# EAGLE board Transmitter V1_ready (EAGLE 9.6.0)
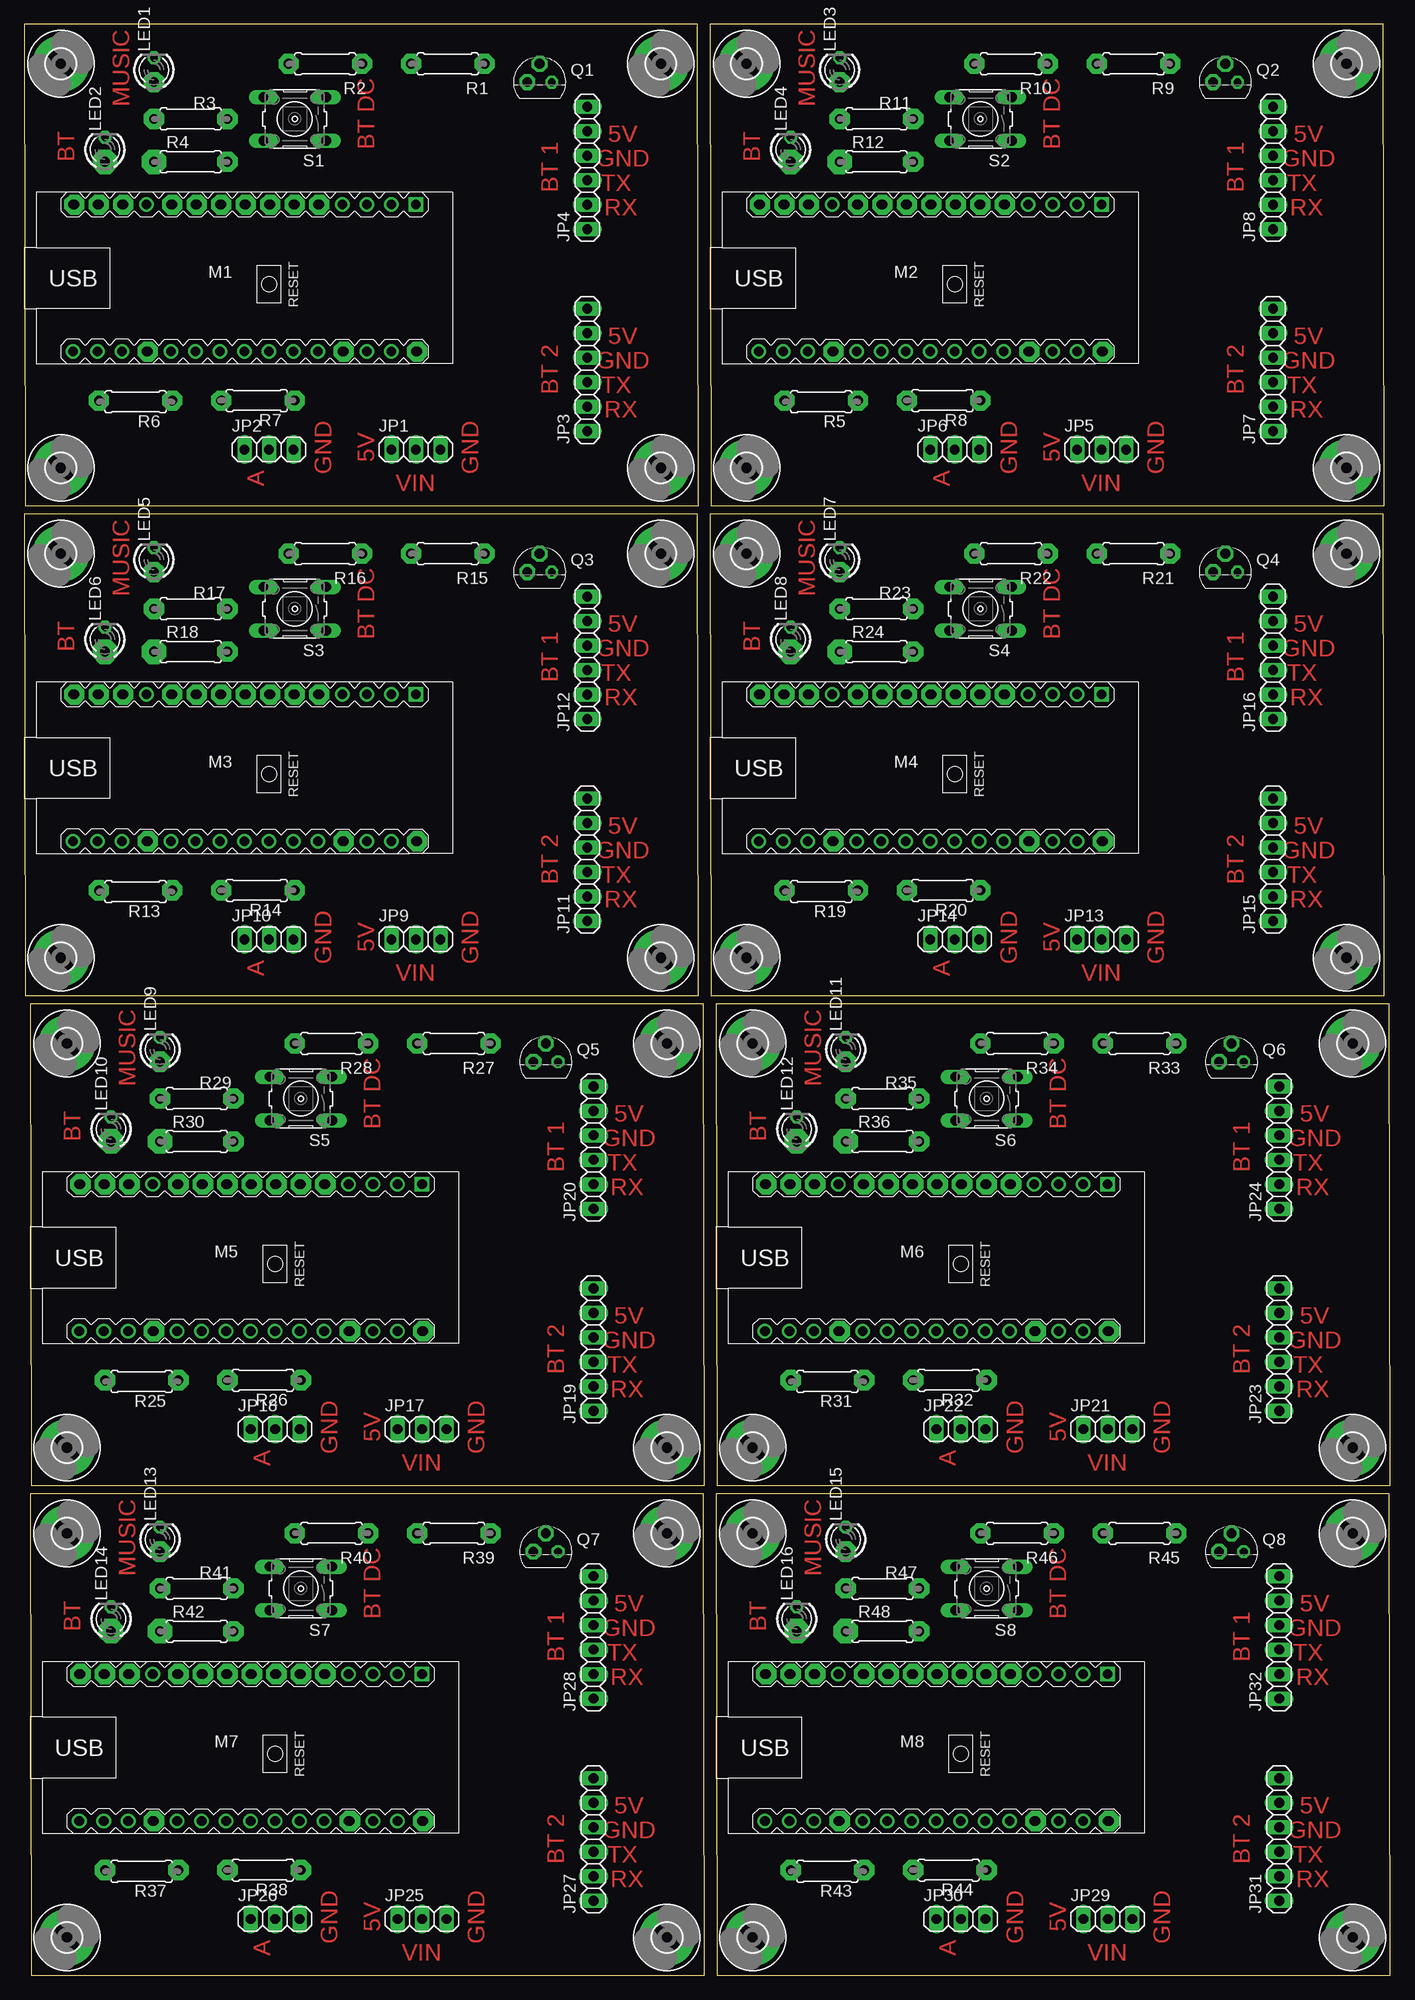
[diagram p0: board, top side]
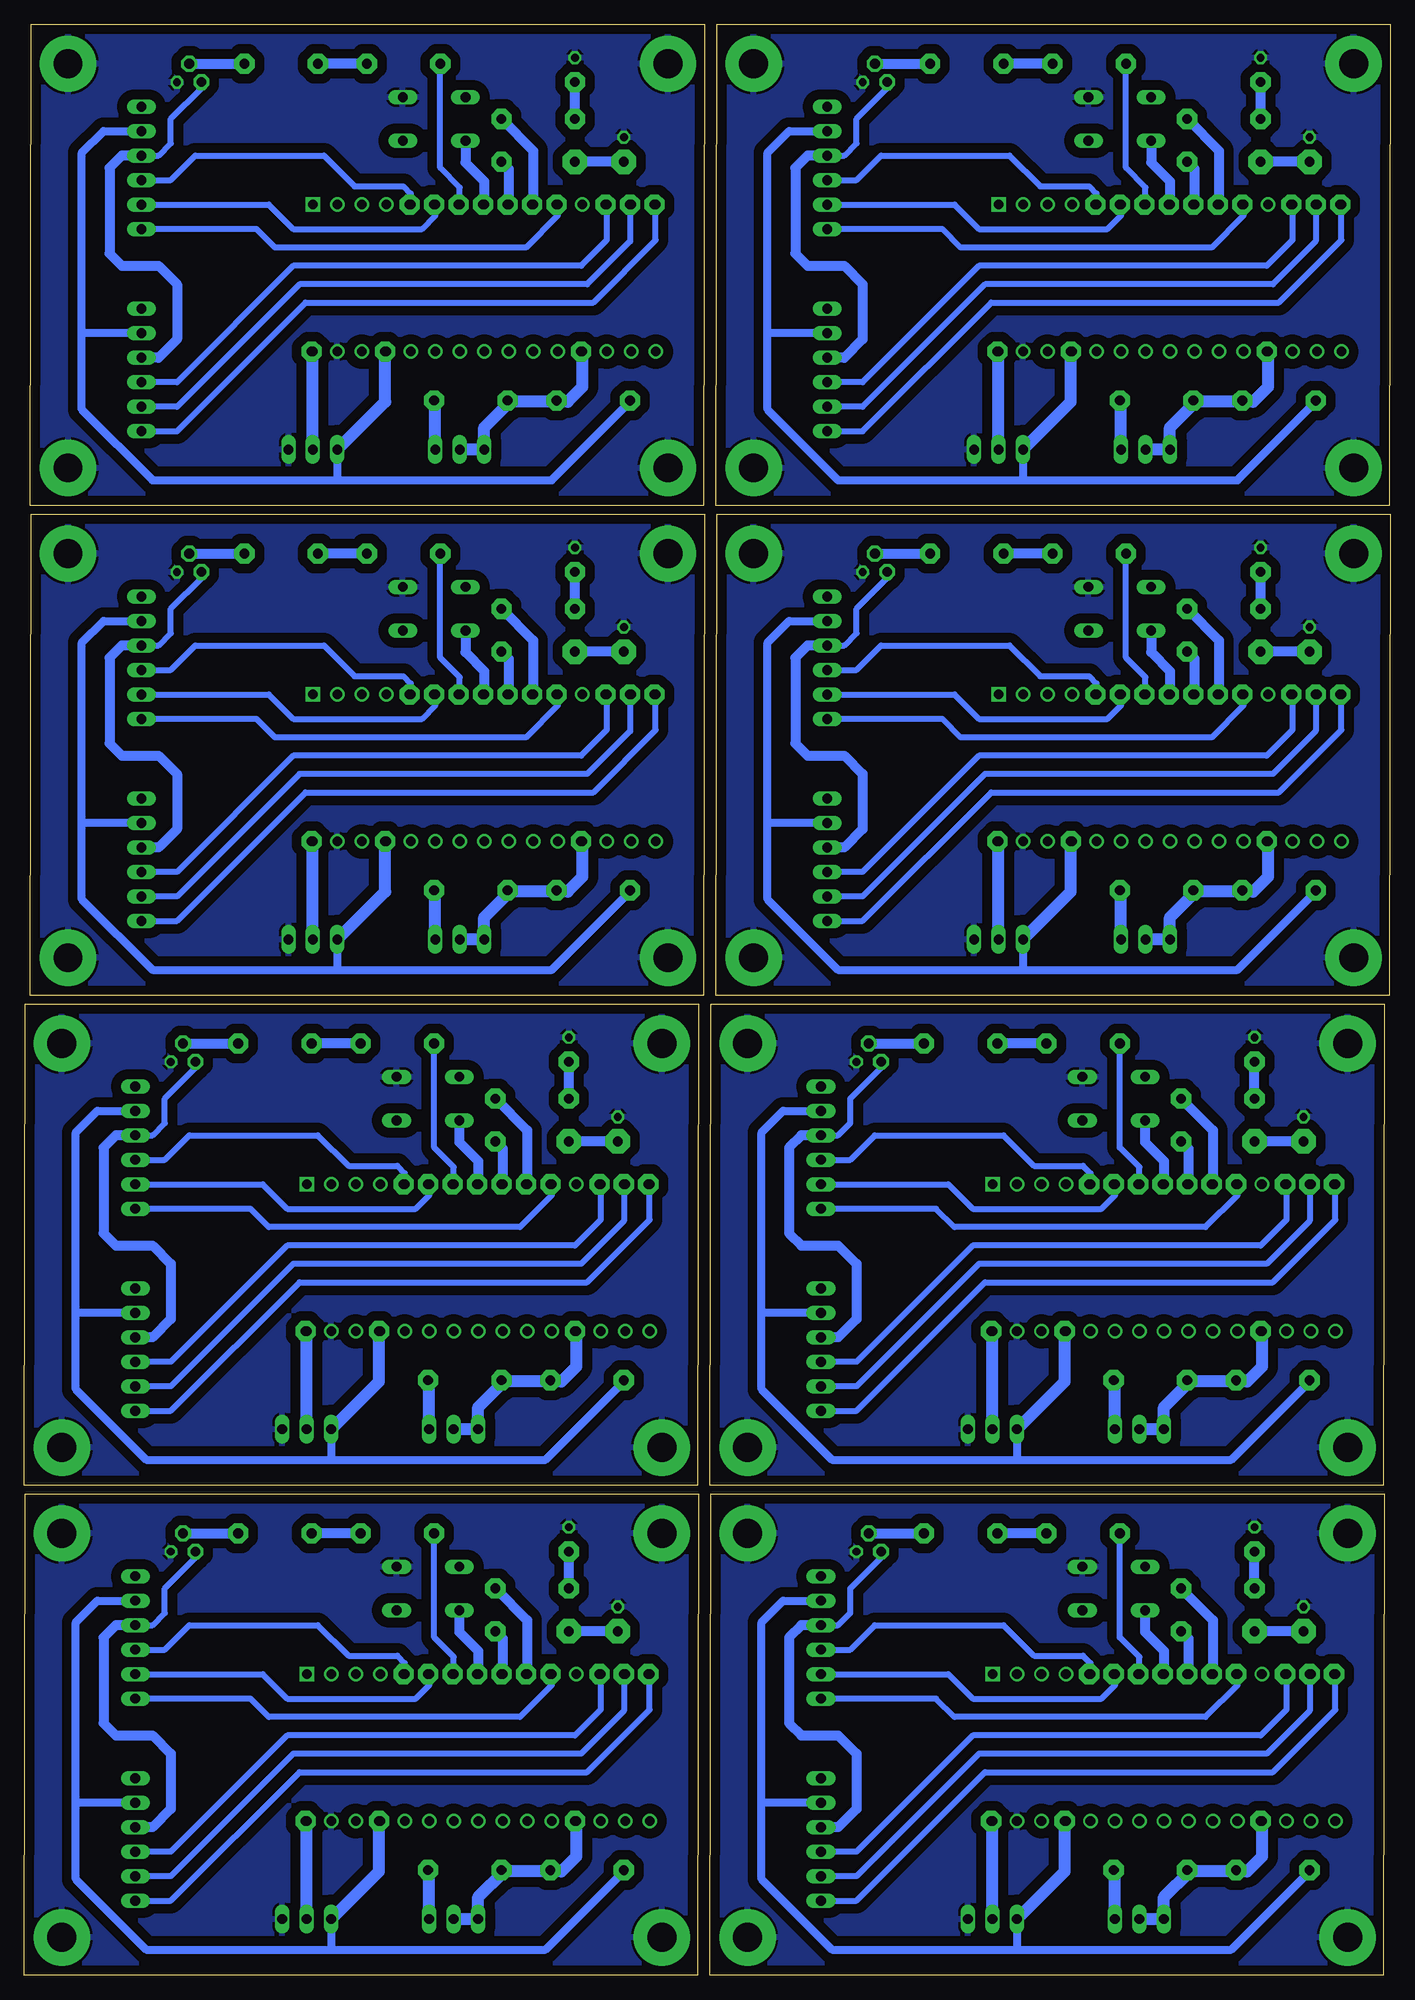
[diagram p1: board, bottom side, seen from below]

Size 141.71 x 202.36 mm. Coordinates in mm from the lower left corner, seen from the top.
Outline: 0.13,152.4 69.96,152.4 69.83,202.36 0,202.36 0.13,152.4
Outline: 71.25,152.4 141.08,152.4 140.95,202.36 71.12,202.36 71.25,152.4
Outline: 0.13,101.6 69.96,101.6 69.83,151.56 0,151.56 0.13,101.6
Outline: 71.25,101.6 141.08,101.6 140.95,151.56 71.12,151.56 71.25,101.6
Outline: 0.76,50.8 70.59,50.8 70.46,100.76 0.64,100.76 0.76,50.8
Outline: 71.88,50.8 141.71,50.8 141.59,100.76 71.75,100.76 71.88,50.8
Outline: 0.76,0 70.59,0 70.46,49.96 0.64,49.96 0.76,0
Outline: 71.88,0 141.71,0 141.59,49.96 71.75,49.96 71.88,0
Copper layers (1*16): Top 0.035mm / dielectric 1.5mm / Bottom 0.035mm
Design rules "default": minimum track width 6mil, minimum drill 0.35mm, track to track 6mil, track to pad 6mil, pad to pad 6mil, via to via 6mil, smd to smd 6mil, copper to edge 40mil, drill to drill 6mil, minimum pad ring 10mil, minimum via ring 8mil, stop-mask expansion 4mil, vias tented up to drill 0mil, thermal gap 10mil

## Footprints (pad centres in the part's own frame; a part is rotated, then mirrored left to right if it is on the bottom)
3,0-PAD = drill 3 pad 5.842: B3,0 0,0
1X03 = drill 1.016 long: 1 -2.54,0; 2 0,0; 3 2.54,0
1X06 = drill 1.016 long: 1 -6.35,0; 2 -3.81,0; 3 -1.27,0; 4 1.27,0; 5 3.81,0; 6 6.35,0
LED3MM = drill 0.813 octagon: A -1.27,0; K 1.27,0
ARDUINO-NANO-3.0 = drill 1 square: J1.1 17.78,7.62 | drill 1: J1.2 15.24,7.62; J1.3 12.7,7.62; J1.4 10.16,7.62; J1.5 7.62,7.62; J1.6 5.08,7.62; J1.7 2.54,7.62; J1.8 0,7.62; J1.9 -2.54,7.62; J1.10 -5.08,7.62; J1.11 -7.62,7.62; J1.12 -10.16,7.62; J1.13 -12.7,7.62; J1.14 -15.24,7.62; J1.15 -17.78,7.62; J2.1 17.78,-7.62; J2.2 15.24,-7.62; J2.3 12.7,-7.62; J2.4 10.16,-7.62; J2.5 7.62,-7.62; J2.6 5.08,-7.62; J2.7 2.54,-7.62; J2.8 0,-7.62; J2.9 -2.54,-7.62; J2.10 -5.08,-7.62; J2.11 -7.62,-7.62; J2.12 -10.16,-7.62; J2.13 -12.7,-7.62; J2.14 -15.24,-7.62; J2.15 -17.78,-7.62
TO92 = drill 0.813 octagon: 1 1.27,0; 2 0,1.905; 3 -1.27,0
0207/7 = drill 0.813 octagon: 1 -3.81,0; 2 3.81,0
B3F-10XX = drill 1.016 long: 1 -3.251,2.261; 2 3.251,2.261; 3 -3.251,-2.261; 4 3.251,-2.261

## Placement (x,y rotation side)
H1  MOUNT-PAD-ROUND3.0  [3,0-PAD]  3.81,198.25 0 top
H2  MOUNT-PAD-ROUND3.0  [3,0-PAD]  66.04,198.25 0 top
H3  MOUNT-PAD-ROUND3.0  [3,0-PAD]  66.04,156.34 0 top
H4  MOUNT-PAD-ROUND3.0  [3,0-PAD]  3.81,156.34 0 top
H5  MOUNT-PAD-ROUND3.0  [3,0-PAD]  74.93,198.25 0 top
H6  MOUNT-PAD-ROUND3.0  [3,0-PAD]  137.16,198.25 0 top
H7  MOUNT-PAD-ROUND3.0  [3,0-PAD]  137.16,156.34 0 top
H8  MOUNT-PAD-ROUND3.0  [3,0-PAD]  74.93,156.34 0 top
H9  MOUNT-PAD-ROUND3.0  [3,0-PAD]  3.81,147.45 0 top
H10  MOUNT-PAD-ROUND3.0  [3,0-PAD]  66.04,147.45 0 top
H11  MOUNT-PAD-ROUND3.0  [3,0-PAD]  66.04,105.54 0 top
H12  MOUNT-PAD-ROUND3.0  [3,0-PAD]  3.81,105.54 0 top
H13  MOUNT-PAD-ROUND3.0  [3,0-PAD]  74.93,147.45 0 top
H14  MOUNT-PAD-ROUND3.0  [3,0-PAD]  137.16,147.45 0 top
H15  MOUNT-PAD-ROUND3.0  [3,0-PAD]  137.16,105.54 0 top
H16  MOUNT-PAD-ROUND3.0  [3,0-PAD]  74.93,105.54 0 top
H17  MOUNT-PAD-ROUND3.0  [3,0-PAD]  4.44,96.65 0 top
H18  MOUNT-PAD-ROUND3.0  [3,0-PAD]  66.67,96.65 0 top
H19  MOUNT-PAD-ROUND3.0  [3,0-PAD]  66.67,54.74 0 top
H20  MOUNT-PAD-ROUND3.0  [3,0-PAD]  4.44,54.74 0 top
H21  MOUNT-PAD-ROUND3.0  [3,0-PAD]  75.56,96.65 0 top
H22  MOUNT-PAD-ROUND3.0  [3,0-PAD]  137.8,96.65 0 top
H23  MOUNT-PAD-ROUND3.0  [3,0-PAD]  137.8,54.74 0 top
H24  MOUNT-PAD-ROUND3.0  [3,0-PAD]  75.56,54.74 0 top
H25  MOUNT-PAD-ROUND3.0  [3,0-PAD]  4.44,45.85 0 top
H26  MOUNT-PAD-ROUND3.0  [3,0-PAD]  66.67,45.85 0 top
H27  MOUNT-PAD-ROUND3.0  [3,0-PAD]  66.67,3.94 0 top
H28  MOUNT-PAD-ROUND3.0  [3,0-PAD]  4.44,3.94 0 top
H29  MOUNT-PAD-ROUND3.0  [3,0-PAD]  75.56,45.85 0 top
H30  MOUNT-PAD-ROUND3.0  [3,0-PAD]  137.8,45.85 0 top
H31  MOUNT-PAD-ROUND3.0  [3,0-PAD]  137.8,3.94 0 top
H32  MOUNT-PAD-ROUND3.0  [3,0-PAD]  75.56,3.94 0 top
JP1  [1X03]  40.64,158.24 0 top
JP2  [1X03]  25.4,158.24 0 top
JP3  [1X06]  58.42,166.5 90 top
JP4  [1X06]  58.42,187.45 90 top
JP5  [1X03]  111.76,158.24 0 top
JP6  [1X03]  96.52,158.24 0 top
JP7  [1X06]  129.54,166.5 90 top
JP8  [1X06]  129.54,187.45 90 top
JP9  [1X03]  40.64,107.44 0 top
JP10  [1X03]  25.4,107.44 0 top
JP11  [1X06]  58.42,115.7 90 top
JP12  [1X06]  58.42,136.65 90 top
JP13  [1X03]  111.76,107.44 0 top
JP14  [1X03]  96.52,107.44 0 top
JP15  [1X06]  129.54,115.7 90 top
JP16  [1X06]  129.54,136.65 90 top
JP17  [1X03]  41.28,56.64 0 top
JP18  [1X03]  26.04,56.64 0 top
JP19  [1X06]  59.05,64.9 90 top
JP20  [1X06]  59.05,85.85 90 top
JP21  [1X03]  112.39,56.64 0 top
JP22  [1X03]  97.16,56.64 0 top
JP23  [1X06]  130.18,64.9 90 top
JP24  [1X06]  130.18,85.85 90 top
JP25  [1X03]  41.28,5.84 0 top
JP26  [1X03]  26.04,5.84 0 top
JP27  [1X06]  59.05,14.1 90 top
JP28  [1X06]  59.05,35.05 90 top
JP29  [1X03]  112.39,5.84 0 top
JP30  [1X03]  97.16,5.84 0 top
JP31  [1X06]  130.18,14.1 90 top
JP32  [1X06]  130.18,35.05 90 top
LED1  [LED3MM]  13.46,197.61 90 top
LED2  [LED3MM]  8.38,189.36 90 top
LED3  [LED3MM]  84.58,197.61 90 top
LED4  [LED3MM]  79.5,189.36 90 top
LED5  [LED3MM]  13.46,146.81 90 top
LED6  [LED3MM]  8.38,138.56 90 top
LED7  [LED3MM]  84.58,146.81 90 top
LED8  [LED3MM]  79.5,138.56 90 top
LED9  [LED3MM]  14.1,96.01 90 top
LED10  [LED3MM]  9.02,87.76 90 top
LED11  [LED3MM]  85.22,96.01 90 top
LED12  [LED3MM]  80.14,87.76 90 top
LED13  [LED3MM]  14.1,45.21 90 top
LED14  [LED3MM]  9.02,36.96 90 top
LED15  [LED3MM]  85.22,45.21 90 top
LED16  [LED3MM]  80.14,36.96 90 top
M1  ARDUINO-NANO-3.0  [ARDUINO-NANO-3.0]  22.86,176.02 0 top
M2  ARDUINO-NANO-3.0  [ARDUINO-NANO-3.0]  93.98,176.02 0 top
M3  ARDUINO-NANO-3.0  [ARDUINO-NANO-3.0]  22.86,125.22 0 top
M4  ARDUINO-NANO-3.0  [ARDUINO-NANO-3.0]  93.98,125.22 0 top
M5  ARDUINO-NANO-3.0  [ARDUINO-NANO-3.0]  23.49,74.42 0 top
M6  ARDUINO-NANO-3.0  [ARDUINO-NANO-3.0]  94.61,74.42 0 top
M7  ARDUINO-NANO-3.0  [ARDUINO-NANO-3.0]  23.49,23.62 0 top
M8  ARDUINO-NANO-3.0  [ARDUINO-NANO-3.0]  94.61,23.62 0 top
Q1  BC547B  [TO92]  53.47,196.34 0 top
Q2  BC547B  [TO92]  124.59,196.34 0 top
Q3  BC547B  [TO92]  53.47,145.54 0 top
Q4  BC547B  [TO92]  124.59,145.54 0 top
Q5  BC547B  [TO92]  54.1,94.74 0 top
Q6  BC547B  [TO92]  125.22,94.74 0 top
Q7  BC547B  [TO92]  54.1,43.94 0 top
Q8  BC547B  [TO92]  125.22,43.94 0 top
R1  82K  [0207/7]  43.94,198.25 180 top
R2  5K6  [0207/7]  31.24,198.25 180 top
R3  100  [0207/7]  17.27,192.53 0 top
R4  100  [0207/7]  17.27,188.09 0 top
R5  100K  [0207/7]  82.68,163.19 180 top
R6  100K  [0207/7]  11.56,163.19 180 top
R7  100K  [0207/7]  24.13,163.32 180 top
R8  100K  [0207/7]  95.25,163.32 180 top
R9  82K  [0207/7]  115.06,198.25 180 top
R10  5K6  [0207/7]  102.36,198.25 180 top
R11  100  [0207/7]  88.39,192.53 0 top
R12  100  [0207/7]  88.39,188.09 0 top
R13  100K  [0207/7]  11.56,112.39 180 top
R14  100K  [0207/7]  24.13,112.52 180 top
R15  82K  [0207/7]  43.94,147.45 180 top
R16  5K6  [0207/7]  31.24,147.45 180 top
R17  100  [0207/7]  17.27,141.73 0 top
R18  100  [0207/7]  17.27,137.29 0 top
R19  100K  [0207/7]  82.68,112.39 180 top
R20  100K  [0207/7]  95.25,112.52 180 top
R21  82K  [0207/7]  115.06,147.45 180 top
R22  5K6  [0207/7]  102.36,147.45 180 top
R23  100  [0207/7]  88.39,141.73 0 top
R24  100  [0207/7]  88.39,137.29 0 top
R25  100K  [0207/7]  12.19,61.59 180 top
R26  100K  [0207/7]  24.77,61.72 180 top
R27  82K  [0207/7]  44.58,96.65 180 top
R28  5K6  [0207/7]  31.88,96.65 180 top
R29  100  [0207/7]  17.91,90.93 0 top
R30  100  [0207/7]  17.91,86.49 0 top
R31  100K  [0207/7]  83.31,61.59 180 top
R32  100K  [0207/7]  95.88,61.72 180 top
R33  82K  [0207/7]  115.7,96.65 180 top
R34  5K6  [0207/7]  103,96.65 180 top
R35  100  [0207/7]  89.03,90.93 0 top
R36  100  [0207/7]  89.03,86.49 0 top
R37  100K  [0207/7]  12.19,10.79 180 top
R38  100K  [0207/7]  24.77,10.92 180 top
R39  82K  [0207/7]  44.58,45.85 180 top
R40  5K6  [0207/7]  31.88,45.85 180 top
R41  100  [0207/7]  17.91,40.13 0 top
R42  100  [0207/7]  17.91,35.69 0 top
R43  100K  [0207/7]  83.31,10.79 180 top
R44  100K  [0207/7]  95.88,10.92 180 top
R45  82K  [0207/7]  115.7,45.85 180 top
R46  5K6  [0207/7]  103,45.85 180 top
R47  100  [0207/7]  89.03,40.13 0 top
R48  100  [0207/7]  89.03,35.69 0 top
S1  [B3F-10XX]  28.07,192.53 180 top
S2  [B3F-10XX]  99.19,192.53 180 top
S3  [B3F-10XX]  28.07,141.73 180 top
S4  [B3F-10XX]  99.19,141.73 180 top
S5  [B3F-10XX]  28.7,90.93 180 top
S6  [B3F-10XX]  99.82,90.93 180 top
S7  [B3F-10XX]  28.7,40.13 180 top
S8  [B3F-10XX]  99.82,40.13 180 top

## Library data of the parts
H1-H32 = holes
JP1-JP32 = pinhead
LED1-LED16 = led
M1-M8 = diy-modules
Q1-Q8 = transistor-npn
R1-R48 = rcl; SPICEPREFIX: R
S1-S8 = switch-omron; MPN: B3F-1000; OC_FARNELL: 176432; OC_NEWARK: 36M3542

## Nets
3V1: M2.J2.14
3V2: M3.J2.14
3V3: M1.J2.14
3V4: M4.J2.14
3V5: M5.J2.14
3V6: M6.J2.14
3V7: M7.J2.14
3V8: M8.J2.14
5V: JP1.1 JP3.5 JP4.5 M1.J2.4 R6.2
5V1: JP5.1 JP7.5 JP8.5 M2.J2.4 R5.2
5V2: JP9.1 JP11.5 JP12.5 M3.J2.4 R13.2
5V3: JP13.1 JP15.5 JP16.5 M4.J2.4 R19.2
5V4: JP17.1 JP19.5 JP20.5 M5.J2.4 R25.2
5V5: JP21.1 JP23.5 JP24.5 M6.J2.4 R31.2
5V6: JP25.1 JP27.5 JP28.5 M7.J2.4 R37.2
5V7: JP29.1 JP31.5 JP32.5 M8.J2.4 R43.2
A0: JP2.1 JP2.2 M1.J2.12 R6.1 R7.2
A1: JP6.1 JP6.2 M2.J2.12 R5.1 R8.2
A2: JP10.1 JP10.2 M3.J2.12 R13.1 R14.2
A3: JP14.1 JP14.2 M4.J2.12 R19.1 R20.2
A4: JP18.1 JP18.2 M5.J2.12 R25.1 R26.2
A5: JP22.1 JP22.2 M6.J2.12 R31.1 R32.2
A6: JP26.1 JP26.2 M7.J2.12 R37.1 R38.2
A7: JP30.1 JP30.2 M8.J2.12 R43.1 R44.2
GND: H1.B3,0 H2.B3,0 H3.B3,0 H4.B3,0 JP1.3 LED1.K LED2.K M1.J2.2 Q1.1 S1.3
GND1: H5.B3,0 H6.B3,0 H7.B3,0 H8.B3,0 JP5.3 LED3.K LED4.K M2.J2.2 Q2.1 S2.3
GND2: H9.B3,0 H10.B3,0 H11.B3,0 H12.B3,0 JP9.3 LED5.K LED6.K M3.J2.2 Q3.1 S3.3
GND3: H13.B3,0 H14.B3,0 H15.B3,0 H16.B3,0 JP13.3 LED7.K LED8.K M4.J2.2 Q4.1 S4.3
GND4: H17.B3,0 H18.B3,0 H19.B3,0 H20.B3,0 JP17.3 LED9.K LED10.K M5.J2.2 Q5.1 S5.3
GND5: H21.B3,0 H22.B3,0 H23.B3,0 H24.B3,0 JP21.3 LED11.K LED12.K M6.J2.2 Q6.1 S6.3
GND6: H25.B3,0 H26.B3,0 H27.B3,0 H28.B3,0 JP25.3 LED13.K LED14.K M7.J2.2 Q7.1 S7.3
GND7: H29.B3,0 H30.B3,0 H31.B3,0 H32.B3,0 JP29.3 LED15.K LED16.K M8.J2.2 Q8.1 S8.3
GND.1: M1.J1.4
GND.2: M2.J1.4
GND.3: M3.J1.4
GND.4: M4.J1.4
GND.5: M5.J1.4
GND.6: M6.J1.4
GND.7: M7.J1.4
GND.8: M8.J1.4
N$1: M1.J1.7 R2.2
N$2: Q1.2 R1.1
N$3: R1.2 R2.1
N$4: JP3.4 JP4.4 Q1.3
N$5: M1.J1.8 S1.2
N$6: JP3.2 M1.J1.14
N$7: LED2.A R4.1
N$8: LED1.A R3.1
N$9: M1.J1.10 R3.2
N$10: M1.J1.9 R4.2
N$11: JP4.2 M1.J1.6
N$12: JP2.3 R7.1
N$13: JP4.3 M1.J1.5
N$14: JP3.3 M1.J1.13
N$15: JP3.1 M1.J1.15
N$18: M1.J2.11
N$46: JP6.3 R8.1
N$47: JP8.3 M2.J1.5
N$48: JP4.1 M1.J1.11
N$49: JP8.2 M2.J1.6
N$50: M2.J2.11
N$51: M2.J1.7 R10.2
N$52: Q2.2 R9.1
N$53: R9.2 R10.1
N$54: JP7.4 JP8.4 Q2.3
N$55: M2.J1.8 S2.2
N$56: LED4.A R12.1
N$57: LED3.A R11.1
N$58: M2.J1.10 R11.2
N$59: M2.J1.9 R12.2
N$60: JP7.2 M2.J1.14
N$61: JP7.3 M2.J1.13
N$62: JP7.1 M2.J1.15
N$63: JP8.1 M2.J1.11
N$93: JP10.3 R14.1
N$94: JP12.3 M3.J1.5
N$95: JP12.2 M3.J1.6
N$96: M3.J2.11
N$97: M3.J1.7 R16.2
N$98: Q3.2 R15.1
N$99: R15.2 R16.1
N$100: JP11.4 JP12.4 Q3.3
N$101: M3.J1.8 S3.2
N$102: LED6.A R18.1
N$103: LED5.A R17.1
N$104: M3.J1.10 R17.2
N$105: M3.J1.9 R18.2
N$106: JP11.2 M3.J1.14
N$107: JP11.3 M3.J1.13
N$108: JP11.1 M3.J1.15
N$109: JP12.1 M3.J1.11
N$139: JP14.3 R20.1
N$140: JP16.3 M4.J1.5
N$141: JP16.2 M4.J1.6
N$142: M4.J2.11
N$143: M4.J1.7 R22.2
N$144: Q4.2 R21.1
N$145: R21.2 R22.1
N$146: JP15.4 JP16.4 Q4.3
N$147: M4.J1.8 S4.2
N$148: LED8.A R24.1
N$149: LED7.A R23.1
N$150: M4.J1.10 R23.2
N$151: M4.J1.9 R24.2
N$152: JP15.2 M4.J1.14
N$153: JP15.3 M4.J1.13
N$154: JP15.1 M4.J1.15
N$155: JP16.1 M4.J1.11
N$185: JP18.3 R26.1
N$186: JP20.3 M5.J1.5
N$187: JP20.2 M5.J1.6
N$188: M5.J2.11
N$189: M5.J1.7 R28.2
N$190: Q5.2 R27.1
N$191: R27.2 R28.1
N$192: JP19.4 JP20.4 Q5.3
N$193: M5.J1.8 S5.2
N$194: LED10.A R30.1
N$195: LED9.A R29.1
N$196: M5.J1.10 R29.2
N$197: M5.J1.9 R30.2
N$198: JP19.2 M5.J1.14
N$199: JP19.3 M5.J1.13
N$200: JP19.1 M5.J1.15
N$201: JP20.1 M5.J1.11
N$231: JP22.3 R32.1
N$232: JP24.3 M6.J1.5
N$233: JP24.2 M6.J1.6
N$234: M6.J2.11
N$235: M6.J1.7 R34.2
N$236: Q6.2 R33.1
N$237: R33.2 R34.1
N$238: JP23.4 JP24.4 Q6.3
N$239: M6.J1.8 S6.2
N$240: LED12.A R36.1
N$241: LED11.A R35.1
N$242: M6.J1.10 R35.2
N$243: M6.J1.9 R36.2
N$244: JP23.2 M6.J1.14
N$245: JP23.3 M6.J1.13
N$246: JP23.1 M6.J1.15
N$247: JP24.1 M6.J1.11
N$277: JP26.3 R38.1
N$278: JP28.3 M7.J1.5
N$279: JP28.2 M7.J1.6
N$280: M7.J2.11
N$281: M7.J1.7 R40.2
N$282: Q7.2 R39.1
N$283: R39.2 R40.1
N$284: JP27.4 JP28.4 Q7.3
N$285: M7.J1.8 S7.2
N$286: LED14.A R42.1
N$287: LED13.A R41.1
N$288: M7.J1.10 R41.2
N$289: M7.J1.9 R42.2
N$290: JP27.2 M7.J1.14
N$291: JP27.3 M7.J1.13
N$292: JP27.1 M7.J1.15
N$293: JP28.1 M7.J1.11
N$323: JP30.3 R44.1
N$324: JP32.3 M8.J1.5
N$325: JP32.2 M8.J1.6
N$326: M8.J2.11
N$327: M8.J1.7 R46.2
N$328: Q8.2 R45.1
N$329: R45.2 R46.1
N$330: JP31.4 JP32.4 Q8.3
N$331: M8.J1.8 S8.2
N$332: LED16.A R48.1
N$333: LED15.A R47.1
N$334: M8.J1.10 R47.2
N$335: M8.J1.9 R48.2
N$336: JP31.2 M8.J1.14
N$337: JP31.3 M8.J1.13
N$338: JP31.1 M8.J1.15
N$339: JP32.1 M8.J1.11
VIN: JP1.2 M1.J2.1
VIN1: JP5.2 M2.J2.1
VIN2: JP9.2 M3.J2.1
VIN3: JP13.2 M4.J2.1
VIN4: JP17.2 M5.J2.1
VIN5: JP21.2 M6.J2.1
VIN6: JP25.2 M7.J2.1
VIN7: JP29.2 M8.J2.1

## Tracks (layer width: path | path; a pad name or v marks a point on that pad's centre or on a via)
5V
  Bottom 0.813: 64.59,170.31 64.59,162.38 57.28,155.07 38.23,155.07 | 64.59,170.31 64.59,189.03 62.36,191.26 JP4.5 | JP3.5 64.59,170.31 | R6.2 15.88,155.07 38.23,155.07 | JP1.1 38.1,155.19 38.23,155.07
  Bottom 1.27: JP1.1 33.15,163.19 33.15,168.27 M1.J2.4
5V1
  Bottom 0.813: 135.71,170.31 135.71,162.38 128.4,155.07 109.35,155.07 | 135.71,170.31 135.71,189.03 133.48,191.26 JP8.5 | JP7.5 135.71,170.31 | R5.2 86.99,155.07 109.35,155.07 | JP5.1 109.22,155.19 109.35,155.07
  Bottom 1.27: JP5.1 104.27,163.19 104.27,168.27 M2.J2.4
5V2
  Bottom 0.813: 64.59,119.51 64.59,111.58 57.28,104.27 38.23,104.27 | 64.59,119.51 64.59,138.23 62.36,140.46 JP12.5 | JP11.5 64.59,119.51 | R13.2 15.88,104.27 38.23,104.27 | JP9.1 38.1,104.39 38.23,104.27
  Bottom 1.27: JP9.1 33.15,112.39 33.15,117.47 M3.J2.4
5V3
  Bottom 0.813: 135.71,119.51 135.71,111.58 128.4,104.27 109.35,104.27 | 135.71,119.51 135.71,138.23 133.48,140.46 JP16.5 | JP15.5 135.71,119.51 | R19.2 86.99,104.27 109.35,104.27 | JP13.1 109.22,104.39 109.35,104.27
  Bottom 1.27: JP13.1 104.27,112.39 104.27,117.47 M4.J2.4
5V4
  Bottom 0.813: 65.23,68.71 65.23,60.78 57.91,53.47 38.86,53.47 | 65.23,68.71 65.23,87.43 62.99,89.66 JP20.5 | JP19.5 65.23,68.71 | R25.2 16.51,53.47 38.86,53.47 | JP17.1 38.73,53.59 38.86,53.47
  Bottom 1.27: JP17.1 33.78,61.59 33.78,66.67 M5.J2.4
5V5
  Bottom 0.813: 136.35,68.71 136.35,60.78 129.03,53.47 109.98,53.47 | 136.35,68.71 136.35,87.43 134.11,89.66 JP24.5 | JP23.5 136.35,68.71 | R31.2 87.63,53.47 109.98,53.47 | JP21.1 109.85,53.59 109.98,53.47
  Bottom 1.27: JP21.1 104.9,61.59 104.9,66.67 M6.J2.4
5V6
  Bottom 0.813: 65.23,17.91 65.23,9.98 57.91,2.67 38.86,2.67 | 65.23,17.91 65.23,36.63 62.99,38.86 JP28.5 | JP27.5 65.23,17.91 | R37.2 16.51,2.67 38.86,2.67 | JP25.1 38.73,2.79 38.86,2.67
  Bottom 1.27: JP25.1 33.78,10.79 33.78,15.88 M7.J2.4
5V7
  Bottom 0.813: 136.35,17.91 136.35,9.98 129.03,2.67 109.98,2.67 | 136.35,17.91 136.35,36.63 134.11,38.86 JP32.5 | JP31.5 136.35,17.91 | R43.2 87.63,2.67 109.98,2.67 | JP29.1 109.85,2.79 109.98,2.67
  Bottom 1.27: JP29.1 104.9,10.79 104.9,15.88 M8.J2.4
A0
  Bottom 1.27: JP2.2 JP2.1 22.86,160.53 20.19,163.19 | 20.19,163.19 R6.1 14.22,163.19 12.7,164.72 M1.J2.12 | 20.19,163.19 R7.2
A1
  Bottom 1.27: JP6.2 JP6.1 93.98,160.53 91.31,163.19 | 91.31,163.19 R5.1 85.34,163.19 83.82,164.72 M2.J2.12 | 91.31,163.19 R8.2
A2
  Bottom 1.27: JP10.2 JP10.1 22.86,109.73 20.19,112.39 | 20.19,112.39 R13.1 14.22,112.39 12.7,113.92 M3.J2.12 | 20.19,112.39 R14.2
A3
  Bottom 1.27: JP14.2 JP14.1 93.98,109.73 91.31,112.39 | 91.31,112.39 R19.1 85.34,112.39 83.82,113.92 M4.J2.12 | 91.31,112.39 R20.2
A4
  Bottom 1.27: JP18.2 JP18.1 23.49,58.93 20.83,61.59 | 20.83,61.59 R25.1 14.86,61.59 13.34,63.12 M5.J2.12 | 20.83,61.59 R26.2
A5
  Bottom 1.27: JP22.2 JP22.1 94.61,58.93 91.95,61.59 | 91.95,61.59 R31.1 85.98,61.59 84.45,63.12 M6.J2.12 | 91.95,61.59 R32.2
A6
  Bottom 1.27: JP26.2 JP26.1 23.49,8.13 20.83,10.79 | 20.83,10.79 R37.1 14.86,10.79 13.34,12.32 M7.J2.12 | 20.83,10.79 R38.2
A7
  Bottom 1.27: JP30.2 JP30.1 94.61,8.13 91.95,10.79 | 91.95,10.79 R43.1 85.98,10.79 84.45,12.32 M8.J2.12 | 91.95,10.79 R44.2
GND
  pour Bottom (isolate 1.016): 0.13,202.06 69.98,202.06 69.98,152.53 0.13,152.53
GND1
  pour Bottom (isolate 1.016): 71.25,202.06 141.1,202.06 141.1,152.53 71.25,152.53
GND2
  pour Bottom (isolate 1.016): 0.13,151.26 69.98,151.26 69.98,101.73 0.13,101.73
GND3
  pour Bottom (isolate 1.016): 71.25,151.26 141.1,151.26 141.1,101.73 71.25,101.73
GND4
  pour Bottom (isolate 1.016): 0.76,100.46 70.61,100.46 70.61,50.93 0.76,50.93
GND5
  pour Bottom (isolate 1.016): 71.88,100.46 141.73,100.46 141.73,50.93 71.88,50.93
GND6
  pour Bottom (isolate 1.016): 0.76,49.66 70.61,49.66 70.61,0.13 0.76,0.13
GND7
  pour Bottom (isolate 1.016): 71.88,49.66 141.73,49.66 141.73,0.13 71.88,0.13
N$1
  Bottom 0.61: M1.J1.7 25.4,185.42 27.43,187.45 R2.2
N$2
  Bottom 1.016: Q1.2 R1.1
N$3
  Bottom 1.016: R2.1 R1.2
N$4
  Bottom 0.61: JP4.4 56.64,188.72 55.37,189.99 55.37,192.53 52.2,195.71 Q1.3
  Bottom 1.016: JP4.4 60.45,188.72 61.72,187.45 61.72,178.56 60.45,177.29 56.64,177.29 54.74,175.39 54.74,169.67 56.64,167.77 JP3.4
N$5
  Bottom 1.016: S1.2 24.82,188.01 22.86,186.05 M1.J1.8
N$6
  Bottom 0.61: JP3.2 54.74,162.69 42.04,175.39 12.19,175.39 7.75,179.83 7.75,183.51
  Bottom 0.813: M1.J1.14 7.75,183.51
N$7
  Bottom 1.016: LED2.A R4.1
N$8
  Bottom 1.016: R3.1 LED1.A
N$9
  Bottom 1.016: R3.2 17.78,189.23 M1.J1.10
N$10
  Bottom 1.016: R4.2 20.32,187.32 M1.J1.9
N$11
  Bottom 0.61: JP4.2 45.21,183.64 42.67,181.1 29.34,181.1 27.94,182.5 M1.J1.6
N$12
  Bottom 1.27: JP2.3 R7.1
N$13
  Bottom 0.61: M1.J1.5 30.48,184.78 31.24,185.55 36.32,185.55 39.5,188.72 52.83,188.72 55.37,186.18 JP4.3
N$14
  Bottom 0.61: JP3.3 54.74,165.23 42.67,177.29 12.83,177.29 10.16,179.96 M1.J1.13
N$15
  Bottom 0.61: JP3.1 54.74,160.15 41.4,173.48 11.56,173.48 5.08,179.96 M1.J1.15
N$16  (via drill 1 pad 2.54)
  other vias: 8.38,188.09
N$17  (via drill 1 pad 2.54)
  other vias: 13.46,188.09
N$19  (via drill 1 pad 2.1)
  other vias: 15.37,183.64
N$20  (via drill 1 pad 2.1)
  other vias: 17.91,183.64
N$21  (via drill 1 pad 2.1)
  other vias: 20.45,183.64
N$22  (via drill 1 pad 2.1)
  other vias: 22.99,183.64
N$23  (via drill 1 pad 2.1)
  other vias: 25.53,183.64
N$24  (via drill 1 pad 2.1)
  other vias: 5.21,183.64
N$25  (via drill 1 pad 2.1)
  other vias: 7.75,183.64
N$26  (via drill 1 pad 2.1)
  other vias: 10.29,183.64
N$27  (via drill 1 pad 2.1)
  other vias: 28.07,183.64
N$28  (via drill 1 pad 2.1)
  other vias: 30.61,183.64
N$29  (via drill 1 pad 2.1)
  other vias: 21.08,188.09
N$30  (via drill 1 pad 2.1)
  other vias: 27.43,198.25
N$31  (via drill 1 pad 2.1)
  other vias: 35.05,198.25
N$32  (via drill 1 pad 2.1)
  other vias: 40.13,198.25
N$33  (via drill 1 pad 2.1)
  other vias: 13.46,196.34
N$34  (via drill 1 pad 2.1)
  other vias: 21.08,192.53
N$35  (via drill 1 pad 2.1)
  other vias: 13.46,192.53
N$36  (via drill 1 pad 2.1)
  other vias: 47.75,198.25
N$37  (via drill 1 pad 1.63)
  other vias: 53.47,198.25
N$38  (via drill 1 pad 1.63)
  other vias: 52.2,196.34
N$39  (via drill 1 pad 2.1)
  other vias: 40.77,168.4
N$40  (via drill 1 pad 2.1)
  other vias: 33.15,168.4
N$41  (via drill 1 pad 2.1)
  other vias: 28.07,163.32
N$42  (via drill 1 pad 2.1)
  other vias: 20.45,163.32
N$43  (via drill 1 pad 2.1)
  other vias: 15.37,163.32
N$44  (via drill 1 pad 2.1)
  other vias: 7.75,163.32
N$45  (via drill 1 pad 2.1)
  other vias: 12.83,168.4
N$46
  Bottom 1.27: JP6.3 R8.1
N$47
  Bottom 0.61: M2.J1.5 101.6,184.78 102.36,185.55 107.44,185.55 110.62,188.72 123.95,188.72 126.49,186.18 JP8.3
N$48
  Bottom 0.61: M1.J1.11 15.24,182.5 18.54,179.2 44.58,179.2 46.48,181.1 JP4.1
N$49
  Bottom 0.61: JP8.2 116.33,183.64 113.79,181.1 100.46,181.1 99.06,182.5 M2.J1.6
N$51
  Bottom 0.61: M2.J1.7 96.52,185.42 98.55,187.45 R10.2
N$52
  Bottom 1.016: Q2.2 R9.1
N$53
  Bottom 1.016: R10.1 R9.2
N$54
  Bottom 0.61: JP8.4 127.76,188.72 126.49,189.99 126.49,192.53 123.32,195.71 Q2.3
  Bottom 1.016: JP8.4 131.57,188.72 132.84,187.45 132.84,178.56 131.57,177.29 127.76,177.29 125.86,175.39 125.86,169.67 127.76,167.77 JP7.4
N$55
  Bottom 1.016: S2.2 95.94,188.01 93.98,186.05 M2.J1.8
N$56
  Bottom 1.016: LED4.A R12.1
N$57
  Bottom 1.016: R11.1 LED3.A
N$58
  Bottom 1.016: R11.2 88.9,189.23 M2.J1.10
N$59
  Bottom 1.016: R12.2 91.44,187.32 M2.J1.9
N$60
  Bottom 0.61: JP7.2 125.86,162.69 113.16,175.39 83.31,175.39 78.87,179.83 78.87,183.51
  Bottom 0.813: M2.J1.14 78.87,183.51
N$61
  Bottom 0.61: JP7.3 125.86,165.23 113.79,177.29 83.95,177.29 81.28,179.96 M2.J1.13
N$62
  Bottom 0.61: JP7.1 125.86,160.15 112.52,173.48 82.68,173.48 76.2,179.96 M2.J1.15
N$63
  Bottom 0.61: M2.J1.11 86.36,182.5 89.66,179.2 115.7,179.2 117.6,181.1 JP8.1
N$64  (via drill 1 pad 2.54)
  other vias: 79.5,188.09
N$65  (via drill 1 pad 2.54)
  other vias: 84.58,188.09
N$66  (via drill 1 pad 2.1)
  other vias: 86.49,183.64
N$67  (via drill 1 pad 2.1)
  other vias: 89.03,183.64
N$68  (via drill 1 pad 2.1)
  other vias: 91.57,183.64
N$69  (via drill 1 pad 2.1)
  other vias: 94.11,183.64
N$70  (via drill 1 pad 2.1)
  other vias: 96.65,183.64
N$71  (via drill 1 pad 2.1)
  other vias: 76.33,183.64
N$72  (via drill 1 pad 2.1)
  other vias: 78.87,183.64
N$73  (via drill 1 pad 2.1)
  other vias: 81.41,183.64
N$74  (via drill 1 pad 2.1)
  other vias: 99.19,183.64
N$75  (via drill 1 pad 2.1)
  other vias: 101.73,183.64
N$76  (via drill 1 pad 2.1)
  other vias: 92.2,188.09
N$77  (via drill 1 pad 2.1)
  other vias: 98.55,198.25
N$78  (via drill 1 pad 2.1)
  other vias: 106.17,198.25
N$79  (via drill 1 pad 2.1)
  other vias: 111.25,198.25
N$80  (via drill 1 pad 2.1)
  other vias: 84.58,196.34
N$81  (via drill 1 pad 2.1)
  other vias: 92.2,192.53
N$82  (via drill 1 pad 2.1)
  other vias: 84.58,192.53
N$83  (via drill 1 pad 2.1)
  other vias: 118.87,198.25
N$84  (via drill 1 pad 1.63)
  other vias: 124.59,198.25
N$85  (via drill 1 pad 1.63)
  other vias: 123.32,196.34
N$86  (via drill 1 pad 2.1)
  other vias: 111.89,168.4
N$87  (via drill 1 pad 2.1)
  other vias: 104.27,168.4
N$88  (via drill 1 pad 2.1)
  other vias: 99.19,163.32
N$89  (via drill 1 pad 2.1)
  other vias: 91.57,163.32
N$90  (via drill 1 pad 2.1)
  other vias: 86.49,163.32
N$91  (via drill 1 pad 2.1)
  other vias: 78.87,163.32
N$92  (via drill 1 pad 2.1)
  other vias: 83.95,168.4
N$93
  Bottom 1.27: JP10.3 R14.1
N$94
  Bottom 0.61: M3.J1.5 30.48,133.98 31.24,134.75 36.32,134.75 39.5,137.92 52.83,137.92 55.37,135.38 JP12.3
N$95
  Bottom 0.61: JP12.2 45.21,132.84 42.67,130.3 29.34,130.3 27.94,131.7 M3.J1.6
N$97
  Bottom 0.61: M3.J1.7 25.4,134.62 27.43,136.65 R16.2
N$98
  Bottom 1.016: Q3.2 R15.1
N$99
  Bottom 1.016: R16.1 R15.2
N$100
  Bottom 0.61: JP12.4 56.64,137.92 55.37,139.19 55.37,141.73 52.2,144.91 Q3.3
  Bottom 1.016: JP12.4 60.45,137.92 61.72,136.65 61.72,127.76 60.45,126.49 56.64,126.49 54.74,124.59 54.74,118.87 56.64,116.97 JP11.4
N$101
  Bottom 1.016: S3.2 24.82,137.21 22.86,135.25 M3.J1.8
N$102
  Bottom 1.016: LED6.A R18.1
N$103
  Bottom 1.016: R17.1 LED5.A
N$104
  Bottom 1.016: R17.2 17.78,138.43 M3.J1.10
N$105
  Bottom 1.016: R18.2 20.32,136.52 M3.J1.9
N$106
  Bottom 0.61: JP11.2 54.74,111.89 42.04,124.59 12.19,124.59 7.75,129.03 7.75,132.71
  Bottom 0.813: M3.J1.14 7.75,132.71
N$107
  Bottom 0.61: JP11.3 54.74,114.43 42.67,126.49 12.83,126.49 10.16,129.16 M3.J1.13
N$108
  Bottom 0.61: JP11.1 54.74,109.35 41.4,122.68 11.56,122.68 5.08,129.16 M3.J1.15
N$109
  Bottom 0.61: M3.J1.11 15.24,131.7 18.54,128.4 44.58,128.4 46.48,130.3 JP12.1
N$110  (via drill 1 pad 2.54)
  other vias: 8.38,137.29
N$111  (via drill 1 pad 2.54)
  other vias: 13.46,137.29
N$112  (via drill 1 pad 2.1)
  other vias: 15.37,132.84
N$113  (via drill 1 pad 2.1)
  other vias: 17.91,132.84
N$114  (via drill 1 pad 2.1)
  other vias: 20.45,132.84
N$115  (via drill 1 pad 2.1)
  other vias: 22.99,132.84
N$116  (via drill 1 pad 2.1)
  other vias: 25.53,132.84
N$117  (via drill 1 pad 2.1)
  other vias: 5.21,132.84
N$118  (via drill 1 pad 2.1)
  other vias: 7.75,132.84
N$119  (via drill 1 pad 2.1)
  other vias: 10.29,132.84
N$120  (via drill 1 pad 2.1)
  other vias: 28.07,132.84
N$121  (via drill 1 pad 2.1)
  other vias: 30.61,132.84
N$122  (via drill 1 pad 2.1)
  other vias: 21.08,137.29
N$123  (via drill 1 pad 2.1)
  other vias: 27.43,147.45
N$124  (via drill 1 pad 2.1)
  other vias: 35.05,147.45
N$125  (via drill 1 pad 2.1)
  other vias: 40.13,147.45
N$126  (via drill 1 pad 2.1)
  other vias: 13.46,145.54
N$127  (via drill 1 pad 2.1)
  other vias: 21.08,141.73
N$128  (via drill 1 pad 2.1)
  other vias: 13.46,141.73
N$129  (via drill 1 pad 2.1)
  other vias: 47.75,147.45
N$130  (via drill 1 pad 1.63)
  other vias: 53.47,147.45
N$131  (via drill 1 pad 1.63)
  other vias: 52.2,145.54
N$132  (via drill 1 pad 2.1)
  other vias: 40.77,117.6
N$133  (via drill 1 pad 2.1)
  other vias: 33.15,117.6
N$134  (via drill 1 pad 2.1)
  other vias: 28.07,112.52
N$135  (via drill 1 pad 2.1)
  other vias: 20.45,112.52
N$136  (via drill 1 pad 2.1)
  other vias: 15.37,112.52
N$137  (via drill 1 pad 2.1)
  other vias: 7.75,112.52
N$138  (via drill 1 pad 2.1)
  other vias: 12.83,117.6
N$139
  Bottom 1.27: JP14.3 R20.1
N$140
  Bottom 0.61: M4.J1.5 101.6,133.98 102.36,134.75 107.44,134.75 110.62,137.92 123.95,137.92 126.49,135.38 JP16.3
N$141
  Bottom 0.61: JP16.2 116.33,132.84 113.79,130.3 100.46,130.3 99.06,131.7 M4.J1.6
N$143
  Bottom 0.61: M4.J1.7 96.52,134.62 98.55,136.65 R22.2
N$144
  Bottom 1.016: Q4.2 R21.1
N$145
  Bottom 1.016: R22.1 R21.2
N$146
  Bottom 0.61: JP16.4 127.76,137.92 126.49,139.19 126.49,141.73 123.32,144.91 Q4.3
  Bottom 1.016: JP16.4 131.57,137.92 132.84,136.65 132.84,127.76 131.57,126.49 127.76,126.49 125.86,124.59 125.86,118.87 127.76,116.97 JP15.4
N$147
  Bottom 1.016: S4.2 95.94,137.21 93.98,135.25 M4.J1.8
N$148
  Bottom 1.016: LED8.A R24.1
N$149
  Bottom 1.016: R23.1 LED7.A
N$150
  Bottom 1.016: R23.2 88.9,138.43 M4.J1.10
N$151
  Bottom 1.016: R24.2 91.44,136.52 M4.J1.9
N$152
  Bottom 0.61: JP15.2 125.86,111.89 113.16,124.59 83.31,124.59 78.87,129.03 78.87,132.71
  Bottom 0.813: M4.J1.14 78.87,132.71
N$153
  Bottom 0.61: JP15.3 125.86,114.43 113.79,126.49 83.95,126.49 81.28,129.16 M4.J1.13
N$154
  Bottom 0.61: JP15.1 125.86,109.35 112.52,122.68 82.68,122.68 76.2,129.16 M4.J1.15
N$155
  Bottom 0.61: M4.J1.11 86.36,131.7 89.66,128.4 115.7,128.4 117.6,130.3 JP16.1
N$156  (via drill 1 pad 2.54)
  other vias: 79.5,137.29
N$157  (via drill 1 pad 2.54)
  other vias: 84.58,137.29
N$158  (via drill 1 pad 2.1)
  other vias: 86.49,132.84
N$159  (via drill 1 pad 2.1)
  other vias: 89.03,132.84
N$160  (via drill 1 pad 2.1)
  other vias: 91.57,132.84
N$161  (via drill 1 pad 2.1)
  other vias: 94.11,132.84
N$162  (via drill 1 pad 2.1)
  other vias: 96.65,132.84
N$163  (via drill 1 pad 2.1)
  other vias: 76.33,132.84
N$164  (via drill 1 pad 2.1)
  other vias: 78.87,132.84
N$165  (via drill 1 pad 2.1)
  other vias: 81.41,132.84
N$166  (via drill 1 pad 2.1)
  other vias: 99.19,132.84
N$167  (via drill 1 pad 2.1)
  other vias: 101.73,132.84
N$168  (via drill 1 pad 2.1)
  other vias: 92.2,137.29
N$169  (via drill 1 pad 2.1)
  other vias: 98.55,147.45
N$170  (via drill 1 pad 2.1)
  other vias: 106.17,147.45
N$171  (via drill 1 pad 2.1)
  other vias: 111.25,147.45
N$172  (via drill 1 pad 2.1)
  other vias: 84.58,145.54
N$173  (via drill 1 pad 2.1)
  other vias: 92.2,141.73
N$174  (via drill 1 pad 2.1)
  other vias: 84.58,141.73
N$175  (via drill 1 pad 2.1)
  other vias: 118.87,147.45
N$176  (via drill 1 pad 1.63)
  other vias: 124.59,147.45
N$177  (via drill 1 pad 1.63)
  other vias: 123.32,145.54
N$178  (via drill 1 pad 2.1)
  other vias: 111.89,117.6
N$179  (via drill 1 pad 2.1)
  other vias: 104.27,117.6
N$180  (via drill 1 pad 2.1)
  other vias: 99.19,112.52
N$181  (via drill 1 pad 2.1)
  other vias: 91.57,112.52
N$182  (via drill 1 pad 2.1)
  other vias: 86.49,112.52
N$183  (via drill 1 pad 2.1)
  other vias: 78.87,112.52
N$184  (via drill 1 pad 2.1)
  other vias: 83.95,117.6
N$185
  Bottom 1.27: JP18.3 R26.1
N$186
  Bottom 0.61: M5.J1.5 31.11,83.18 31.88,83.95 36.96,83.95 40.13,87.12 53.47,87.12 56.01,84.58 JP20.3
N$187
  Bottom 0.61: JP20.2 45.85,82.04 43.31,79.5 29.97,79.5 28.57,80.9 M5.J1.6
N$189
  Bottom 0.61: M5.J1.7 26.04,83.82 28.07,85.85 R28.2
N$190
  Bottom 1.016: Q5.2 R27.1
N$191
  Bottom 1.016: R28.1 R27.2
N$192
  Bottom 0.61: JP20.4 57.28,87.12 56.01,88.39 56.01,90.93 52.83,94.11 Q5.3
  Bottom 1.016: JP20.4 61.09,87.12 62.36,85.85 62.36,76.96 61.09,75.69 57.28,75.69 55.37,73.79 55.37,68.07 57.28,66.17 JP19.4
N$193
  Bottom 1.016: S5.2 25.45,86.41 23.49,84.45 M5.J1.8
N$194
  Bottom 1.016: LED10.A R30.1
N$195
  Bottom 1.016: R29.1 LED9.A
N$196
  Bottom 1.016: R29.2 18.41,87.63 M5.J1.10
N$197
  Bottom 1.016: R30.2 20.95,85.72 M5.J1.9
N$198
  Bottom 0.61: JP19.2 55.37,61.09 42.67,73.79 12.83,73.79 8.38,78.23 8.38,81.91
  Bottom 0.813: M5.J1.14 8.38,81.91
N$199
  Bottom 0.61: JP19.3 55.37,63.63 43.31,75.69 13.46,75.69 10.79,78.36 M5.J1.13
N$200
  Bottom 0.61: JP19.1 55.37,58.55 42.04,71.88 12.19,71.88 5.71,78.36 M5.J1.15
N$201
  Bottom 0.61: M5.J1.11 15.88,80.9 19.18,77.6 45.21,77.6 47.12,79.5 JP20.1
N$202  (via drill 1 pad 2.54)
  other vias: 9.02,86.49
N$203  (via drill 1 pad 2.54)
  other vias: 14.1,86.49
N$204  (via drill 1 pad 2.1)
  other vias: 16,82.04
N$205  (via drill 1 pad 2.1)
  other vias: 18.54,82.04
N$206  (via drill 1 pad 2.1)
  other vias: 21.08,82.04
N$207  (via drill 1 pad 2.1)
  other vias: 23.62,82.04
N$208  (via drill 1 pad 2.1)
  other vias: 26.16,82.04
N$209  (via drill 1 pad 2.1)
  other vias: 5.84,82.04
N$210  (via drill 1 pad 2.1)
  other vias: 8.38,82.04
N$211  (via drill 1 pad 2.1)
  other vias: 10.92,82.04
N$212  (via drill 1 pad 2.1)
  other vias: 28.7,82.04
N$213  (via drill 1 pad 2.1)
  other vias: 31.24,82.04
N$214  (via drill 1 pad 2.1)
  other vias: 21.72,86.49
N$215  (via drill 1 pad 2.1)
  other vias: 28.07,96.65
N$216  (via drill 1 pad 2.1)
  other vias: 35.69,96.65
N$217  (via drill 1 pad 2.1)
  other vias: 40.77,96.65
N$218  (via drill 1 pad 2.1)
  other vias: 14.1,94.74
N$219  (via drill 1 pad 2.1)
  other vias: 21.72,90.93
N$220  (via drill 1 pad 2.1)
  other vias: 14.1,90.93
N$221  (via drill 1 pad 2.1)
  other vias: 48.39,96.65
N$222  (via drill 1 pad 1.63)
  other vias: 54.1,96.65
N$223  (via drill 1 pad 1.63)
  other vias: 52.83,94.74
N$224  (via drill 1 pad 2.1)
  other vias: 41.4,66.8
N$225  (via drill 1 pad 2.1)
  other vias: 33.78,66.8
N$226  (via drill 1 pad 2.1)
  other vias: 28.7,61.72
N$227  (via drill 1 pad 2.1)
  other vias: 21.08,61.72
N$228  (via drill 1 pad 2.1)
  other vias: 16,61.72
N$229  (via drill 1 pad 2.1)
  other vias: 8.38,61.72
N$230  (via drill 1 pad 2.1)
  other vias: 13.46,66.8
N$231
  Bottom 1.27: JP22.3 R32.1
N$232
  Bottom 0.61: M6.J1.5 102.23,83.18 103,83.95 108.08,83.95 111.25,87.12 124.59,87.12 127.13,84.58 JP24.3
N$233
  Bottom 0.61: JP24.2 116.97,82.04 114.43,79.5 101.09,79.5 99.69,80.9 M6.J1.6
N$235
  Bottom 0.61: M6.J1.7 97.16,83.82 99.19,85.85 R34.2
N$236
  Bottom 1.016: Q6.2 R33.1
N$237
  Bottom 1.016: R34.1 R33.2
N$238
  Bottom 0.61: JP24.4 128.4,87.12 127.13,88.39 127.13,90.93 123.95,94.11 Q6.3
  Bottom 1.016: JP24.4 132.21,87.12 133.48,85.85 133.48,76.96 132.21,75.69 128.4,75.69 126.49,73.79 126.49,68.07 128.4,66.17 JP23.4
N$239
  Bottom 1.016: S6.2 96.57,86.41 94.61,84.45 M6.J1.8
N$240
  Bottom 1.016: LED12.A R36.1
N$241
  Bottom 1.016: R35.1 LED11.A
N$242
  Bottom 1.016: R35.2 89.53,87.63 M6.J1.10
N$243
  Bottom 1.016: R36.2 92.07,85.72 M6.J1.9
N$244
  Bottom 0.61: JP23.2 126.49,61.09 113.79,73.79 83.95,73.79 79.5,78.23 79.5,81.91
  Bottom 0.813: M6.J1.14 79.5,81.91
N$245
  Bottom 0.61: JP23.3 126.49,63.63 114.43,75.69 84.58,75.69 81.91,78.36 M6.J1.13
N$246
  Bottom 0.61: JP23.1 126.49,58.55 113.16,71.88 83.31,71.88 76.83,78.36 M6.J1.15
N$247
  Bottom 0.61: M6.J1.11 86.99,80.9 90.3,77.6 116.33,77.6 118.24,79.5 JP24.1
N$248  (via drill 1 pad 2.54)
  other vias: 80.14,86.49
N$249  (via drill 1 pad 2.54)
  other vias: 85.22,86.49
N$250  (via drill 1 pad 2.1)
  other vias: 87.12,82.04
N$251  (via drill 1 pad 2.1)
  other vias: 89.66,82.04
N$252  (via drill 1 pad 2.1)
  other vias: 92.2,82.04
N$253  (via drill 1 pad 2.1)
  other vias: 94.74,82.04
N$254  (via drill 1 pad 2.1)
  other vias: 97.28,82.04
N$255  (via drill 1 pad 2.1)
  other vias: 76.96,82.04
N$256  (via drill 1 pad 2.1)
  other vias: 79.5,82.04
N$257  (via drill 1 pad 2.1)
  other vias: 82.04,82.04
N$258  (via drill 1 pad 2.1)
  other vias: 99.82,82.04
N$259  (via drill 1 pad 2.1)
  other vias: 102.36,82.04
N$260  (via drill 1 pad 2.1)
  other vias: 92.84,86.49
N$261  (via drill 1 pad 2.1)
  other vias: 99.19,96.65
N$262  (via drill 1 pad 2.1)
  other vias: 106.81,96.65
N$263  (via drill 1 pad 2.1)
  other vias: 111.89,96.65
N$264  (via drill 1 pad 2.1)
  other vias: 85.22,94.74
N$265  (via drill 1 pad 2.1)
  other vias: 92.84,90.93
N$266  (via drill 1 pad 2.1)
  other vias: 85.22,90.93
N$267  (via drill 1 pad 2.1)
  other vias: 119.51,96.65
N$268  (via drill 1 pad 1.63)
  other vias: 125.22,96.65
N$269  (via drill 1 pad 1.63)
  other vias: 123.95,94.74
N$270  (via drill 1 pad 2.1)
  other vias: 112.52,66.8
N$271  (via drill 1 pad 2.1)
  other vias: 104.9,66.8
N$272  (via drill 1 pad 2.1)
  other vias: 99.82,61.72
N$273  (via drill 1 pad 2.1)
  other vias: 92.2,61.72
N$274  (via drill 1 pad 2.1)
  other vias: 87.12,61.72
N$275  (via drill 1 pad 2.1)
  other vias: 79.5,61.72
N$276  (via drill 1 pad 2.1)
  other vias: 84.58,66.8
N$277
  Bottom 1.27: JP26.3 R38.1
N$278
  Bottom 0.61: M7.J1.5 31.11,32.38 31.88,33.15 36.96,33.15 40.13,36.32 53.47,36.32 56.01,33.78 JP28.3
N$279
  Bottom 0.61: JP28.2 45.85,31.24 43.31,28.7 29.97,28.7 28.57,30.1 M7.J1.6
N$281
  Bottom 0.61: M7.J1.7 26.04,33.02 28.07,35.05 R40.2
N$282
  Bottom 1.016: Q7.2 R39.1
N$283
  Bottom 1.016: R40.1 R39.2
N$284
  Bottom 0.61: JP28.4 57.28,36.32 56.01,37.59 56.01,40.13 52.83,43.31 Q7.3
  Bottom 1.016: JP28.4 61.09,36.32 62.36,35.05 62.36,26.16 61.09,24.89 57.28,24.89 55.37,22.99 55.37,17.27 57.28,15.37 JP27.4
N$285
  Bottom 1.016: S7.2 25.45,35.61 23.49,33.65 M7.J1.8
N$286
  Bottom 1.016: LED14.A R42.1
N$287
  Bottom 1.016: R41.1 LED13.A
N$288
  Bottom 1.016: R41.2 18.41,36.83 M7.J1.10
N$289
  Bottom 1.016: R42.2 20.95,34.92 M7.J1.9
N$290
  Bottom 0.61: JP27.2 55.37,10.29 42.67,22.99 12.83,22.99 8.38,27.43 8.38,31.11
  Bottom 0.813: M7.J1.14 8.38,31.11
N$291
  Bottom 0.61: JP27.3 55.37,12.83 43.31,24.89 13.46,24.89 10.79,27.56 M7.J1.13
N$292
  Bottom 0.61: JP27.1 55.37,7.75 42.04,21.08 12.19,21.08 5.71,27.56 M7.J1.15
N$293
  Bottom 0.61: M7.J1.11 15.88,30.1 19.18,26.8 45.21,26.8 47.12,28.7 JP28.1
N$294  (via drill 1 pad 2.54)
  other vias: 9.02,35.69
N$295  (via drill 1 pad 2.54)
  other vias: 14.1,35.69
N$296  (via drill 1 pad 2.1)
  other vias: 16,31.24
N$297  (via drill 1 pad 2.1)
  other vias: 18.54,31.24
N$298  (via drill 1 pad 2.1)
  other vias: 21.08,31.24
N$299  (via drill 1 pad 2.1)
  other vias: 23.62,31.24
N$300  (via drill 1 pad 2.1)
  other vias: 26.16,31.24
N$301  (via drill 1 pad 2.1)
  other vias: 5.84,31.24
N$302  (via drill 1 pad 2.1)
  other vias: 8.38,31.24
N$303  (via drill 1 pad 2.1)
  other vias: 10.92,31.24
N$304  (via drill 1 pad 2.1)
  other vias: 28.7,31.24
N$305  (via drill 1 pad 2.1)
  other vias: 31.24,31.24
N$306  (via drill 1 pad 2.1)
  other vias: 21.72,35.69
N$307  (via drill 1 pad 2.1)
  other vias: 28.07,45.85
N$308  (via drill 1 pad 2.1)
  other vias: 35.69,45.85
N$309  (via drill 1 pad 2.1)
  other vias: 40.77,45.85
N$310  (via drill 1 pad 2.1)
  other vias: 14.1,43.94
N$311  (via drill 1 pad 2.1)
  other vias: 21.72,40.13
N$312  (via drill 1 pad 2.1)
  other vias: 14.1,40.13
N$313  (via drill 1 pad 2.1)
  other vias: 48.39,45.85
N$314  (via drill 1 pad 1.63)
  other vias: 54.1,45.85
N$315  (via drill 1 pad 1.63)
  other vias: 52.83,43.94
N$316  (via drill 1 pad 2.1)
  other vias: 41.4,16
N$317  (via drill 1 pad 2.1)
  other vias: 33.78,16
N$318  (via drill 1 pad 2.1)
  other vias: 28.7,10.92
N$319  (via drill 1 pad 2.1)
  other vias: 21.08,10.92
N$320  (via drill 1 pad 2.1)
  other vias: 16,10.92
N$321  (via drill 1 pad 2.1)
  other vias: 8.38,10.92
N$322  (via drill 1 pad 2.1)
  other vias: 13.46,16
N$323
  Bottom 1.27: JP30.3 R44.1
N$324
  Bottom 0.61: M8.J1.5 102.23,32.38 103,33.15 108.08,33.15 111.25,36.32 124.59,36.32 127.13,33.78 JP32.3
N$325
  Bottom 0.61: JP32.2 116.97,31.24 114.43,28.7 101.09,28.7 99.69,30.1 M8.J1.6
N$327
  Bottom 0.61: M8.J1.7 97.16,33.02 99.19,35.05 R46.2
N$328
  Bottom 1.016: Q8.2 R45.1
N$329
  Bottom 1.016: R46.1 R45.2
N$330
  Bottom 0.61: JP32.4 128.4,36.32 127.13,37.59 127.13,40.13 123.95,43.31 Q8.3
  Bottom 1.016: JP32.4 132.21,36.32 133.48,35.05 133.48,26.16 132.21,24.89 128.4,24.89 126.49,22.99 126.49,17.27 128.4,15.37 JP31.4
N$331
  Bottom 1.016: S8.2 96.57,35.61 94.61,33.65 M8.J1.8
N$332
  Bottom 1.016: LED16.A R48.1
N$333
  Bottom 1.016: R47.1 LED15.A
N$334
  Bottom 1.016: R47.2 89.53,36.83 M8.J1.10
N$335
  Bottom 1.016: R48.2 92.07,34.92 M8.J1.9
N$336
  Bottom 0.61: JP31.2 126.49,10.29 113.79,22.99 83.95,22.99 79.5,27.43 79.5,31.11
  Bottom 0.813: M8.J1.14 79.5,31.11
N$337
  Bottom 0.61: JP31.3 126.49,12.83 114.43,24.89 84.58,24.89 81.91,27.56 M8.J1.13
N$338
  Bottom 0.61: JP31.1 126.49,7.75 113.16,21.08 83.31,21.08 76.83,27.56 M8.J1.15
N$339
  Bottom 0.61: M8.J1.11 86.99,30.1 90.3,26.8 116.33,26.8 118.24,28.7 JP32.1
N$340  (via drill 1 pad 2.54)
  other vias: 80.14,35.69
N$341  (via drill 1 pad 2.54)
  other vias: 85.22,35.69
N$342  (via drill 1 pad 2.1)
  other vias: 87.12,31.24
N$343  (via drill 1 pad 2.1)
  other vias: 89.66,31.24
N$344  (via drill 1 pad 2.1)
  other vias: 92.2,31.24
N$345  (via drill 1 pad 2.1)
  other vias: 94.74,31.24
N$346  (via drill 1 pad 2.1)
  other vias: 97.28,31.24
N$347  (via drill 1 pad 2.1)
  other vias: 76.96,31.24
N$348  (via drill 1 pad 2.1)
  other vias: 79.5,31.24
N$349  (via drill 1 pad 2.1)
  other vias: 82.04,31.24
N$350  (via drill 1 pad 2.1)
  other vias: 99.82,31.24
N$351  (via drill 1 pad 2.1)
  other vias: 102.36,31.24
N$352  (via drill 1 pad 2.1)
  other vias: 92.84,35.69
N$353  (via drill 1 pad 2.1)
  other vias: 99.19,45.85
N$354  (via drill 1 pad 2.1)
  other vias: 106.81,45.85
N$355  (via drill 1 pad 2.1)
  other vias: 111.89,45.85
N$356  (via drill 1 pad 2.1)
  other vias: 85.22,43.94
N$357  (via drill 1 pad 2.1)
  other vias: 92.84,40.13
N$358  (via drill 1 pad 2.1)
  other vias: 85.22,40.13
N$359  (via drill 1 pad 2.1)
  other vias: 119.51,45.85
N$360  (via drill 1 pad 1.63)
  other vias: 125.22,45.85
N$361  (via drill 1 pad 1.63)
  other vias: 123.95,43.94
N$362  (via drill 1 pad 2.1)
  other vias: 112.52,16
N$363  (via drill 1 pad 2.1)
  other vias: 104.9,16
N$364  (via drill 1 pad 2.1)
  other vias: 99.82,10.92
N$365  (via drill 1 pad 2.1)
  other vias: 92.2,10.92
N$366  (via drill 1 pad 2.1)
  other vias: 87.12,10.92
N$367  (via drill 1 pad 2.1)
  other vias: 79.5,10.92
N$368  (via drill 1 pad 2.1)
  other vias: 84.58,16
VIN
  Bottom 1.27: JP1.2 M1.J2.1
VIN1
  Bottom 1.27: JP5.2 M2.J2.1
VIN2
  Bottom 1.27: JP9.2 M3.J2.1
VIN3
  Bottom 1.27: JP13.2 M4.J2.1
VIN4
  Bottom 1.27: JP17.2 M5.J2.1
VIN5
  Bottom 1.27: JP21.2 M6.J2.1
VIN6
  Bottom 1.27: JP25.2 M7.J2.1
VIN7
  Bottom 1.27: JP29.2 M8.J2.1

## Text on the board
Top: MUSIC | MUSIC | 5V | 5V | BT DC | GND | BT DC | GND | BT | BT | TX | TX | BT 1 | RX | BT 1 | RX | 5V | 5V | GND | GND | TX | TX | BT 2 | RX | BT 2 | RX | 5V | 5V | GND | VIN | GND | GND | VIN | GND | A | A | MUSIC | MUSIC | 5V | 5V | BT DC | GND | BT DC | GND | BT | BT | TX | TX | BT 1 | BT 1 | RX | RX | 5V | 5V | GND | GND | TX | TX | BT 2 | BT 2 | RX | RX | 5V | 5V | GND | VIN | GND | GND | VIN | GND | A | A | MUSIC | MUSIC | 5V | 5V | BT DC | GND | BT DC | GND | BT | BT | TX | TX | BT 1 | BT 1 | RX | RX | 5V | 5V | GND | GND | TX | TX | BT 2 | BT 2 | RX | RX | 5V | 5V | GND | VIN | GND | GND | VIN | GND | A | A | MUSIC | MUSIC | 5V | 5V | BT DC | GND | BT DC | GND | BT | BT | TX | TX | BT 1 | BT 1 | RX | RX | 5V | 5V | GND | GND | TX | TX | BT 2 | BT 2 | RX | RX | 5V | 5V | GND | VIN | GND | GND | VIN | GND | A | A